# Allegro board Pictograma.brd
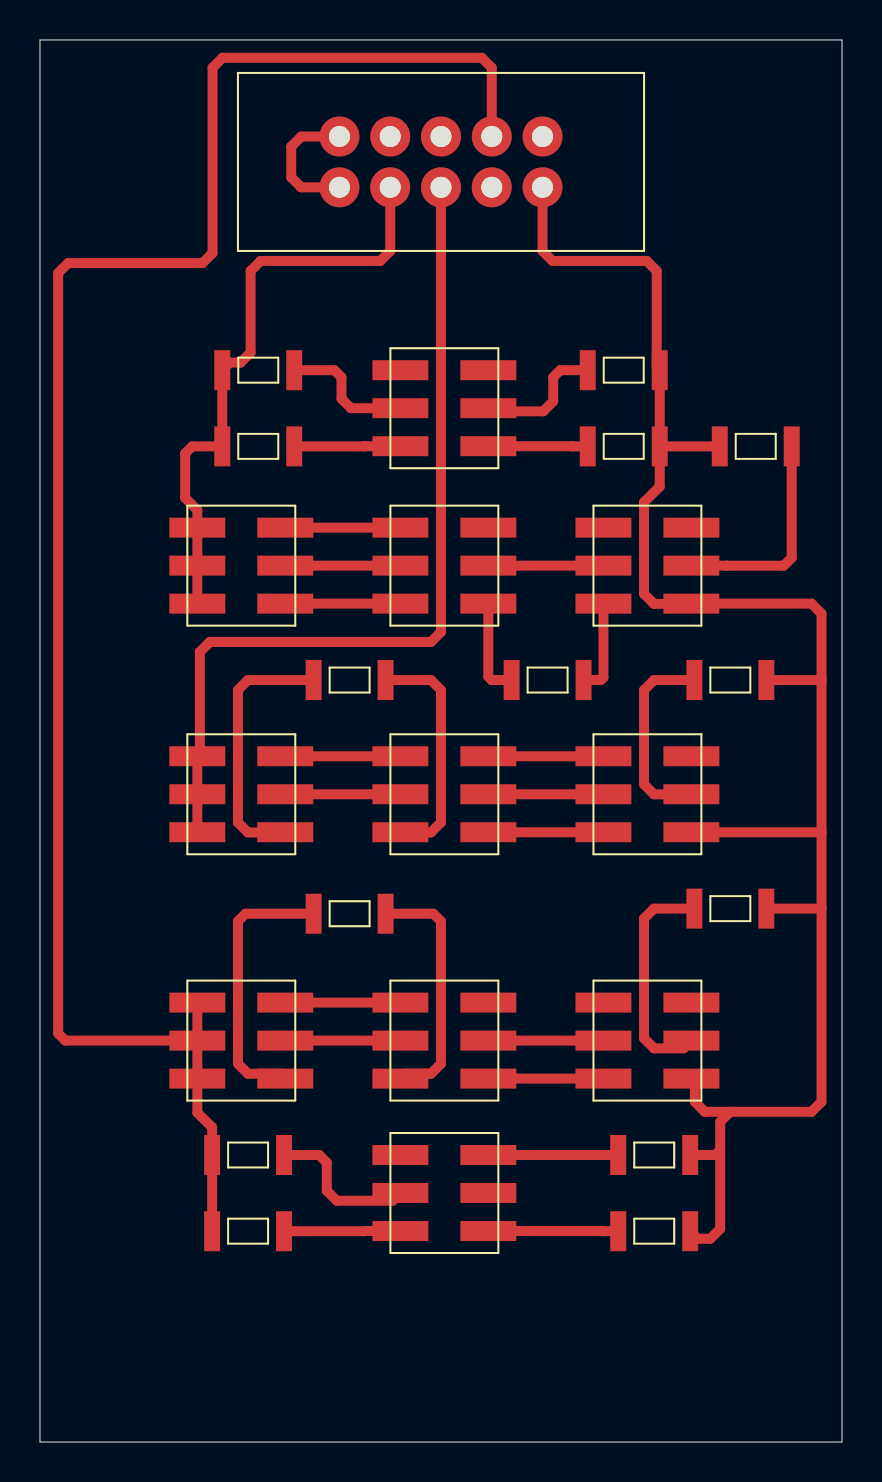
[diagram p0: board, top side]
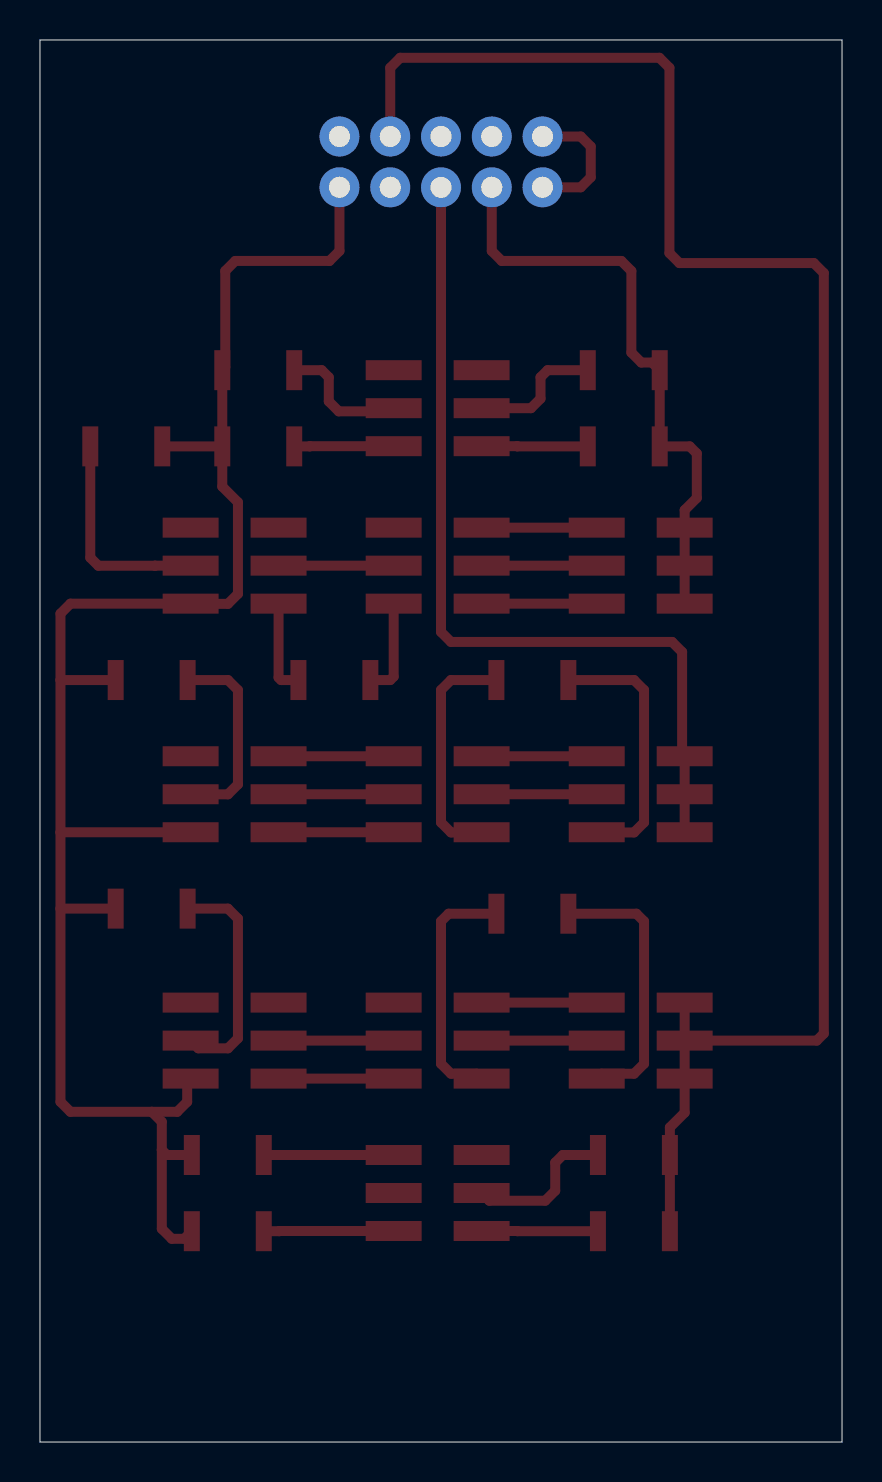
[diagram p1: board, bottom side, seen from below]

Outline 40.13 x 70.1 mm; copper layers: TOP, BOTTOM. Coordinates in mm from the lower left corner of the outline.
Outline path: 0,70.1 40.13,70.1 40.13,0 0,0 0,70.1

## Design rules (mm)
constraint set DEFAULT: min track width 0.127

## Placement (name value [footprint] x y rotation side)
CN1  Conector  [CONECTOR]  25.15 65.28 270 top
L1  Led  [LED32]  18.03 53.59 0 top
L2  Led  [LED32]  7.87 45.72 0 top
L3  Led  [LED32]  18.03 45.72 0 top
L4  Led  [LED32]  28.19 45.72 0 top
L5  Led  [LED32]  7.87 34.29 0 top
L6  Led  [LED32]  18.03 34.29 0 top
L7  Led  [LED32]  28.19 34.29 0 top
L8  Led  [LED32]  7.87 21.97 0 top
L9  Led  [LED32]  18.03 21.97 0 top
L10  Led  [LED32]  28.19 21.97 0 top
L11  Led  [LED32]  18.03 14.35 0 top
R1  Resistor  [RESISTOR2]  10.92 53.59 0 top
R2  Resistor  [RESISTOR2]  29.21 53.59 0 top
R3  Resistor  [RESISTOR2]  10.92 49.78 0 top
R4  Resistor  [RESISTOR2]  29.21 49.78 0 top
R5  Resistor  [RESISTOR2]  35.81 49.78 0 top
R6  Resistor  [RESISTOR2]  15.49 38.1 0 top
R7  Resistor  [RESISTOR2]  25.4 38.1 0 top
R8  Resistor  [RESISTOR2]  34.54 38.1 0 top
R9  Resistor  [RESISTOR2]  15.49 26.42 0 top
R10  Resistor  [RESISTOR2]  34.54 26.67 0 top
R11  Resistor  [RESISTOR2]  10.41 14.35 0 top
R12  Resistor  [RESISTOR2]  30.73 14.35 0 top
R13  Resistor  [RESISTOR2]  10.41 10.54 0 top
R14  Resistor  [RESISTOR2]  30.73 10.54 0 top

## Library data of the parts
CN1 = Conector
L1-L11 = Led
R1-R14 = Resistor

## Footprints (pads in the part's own frame, mm; a bottom-side part is the same pattern mirrored in y, then rotated)
CONECTOR
  round 2 hole 1.05: 1(0,0) 2(0,-2.54) 3(0,-5.08) 4(0,-7.62) 5(0,-10.16) 6(2.54,-10.16) 7(2.54,-7.62) 8(2.54,-5.08) 9(2.54,-2.54) 10(2.54,0)
LED32
  rect 2.8x1 smd: 1(0,0) 2(0,-1.9) 3(0,-3.8) 4(4.4,-3.8) 5(4.4,-1.9) 6(4.4,0)
RESISTOR2
  rect 0.8x2 smd: 1(-1.8,0) 2(1.8,0)

## Nets
N09998: CN1.8 L5.1 L5.2 L5.3(C3)
N10032: CN1.2 L8.1 L8.2 L8.3(C3) R11.1 R13.1
N11043: CN1.10 L4.4 L7.4 L10.4 R2.2 R4.2 R5.1 R8.2 R10.2 R12.2 R14.2
N11102: L4.5 R5.2
N11109: L1.4 R4.1
N11113: L1.5 R2.1
N11120: L1.3(C3) R3.2
N11124: CN1.7 L2.1 L2.2 L2.3(C3) R1.1 R3.1
N11150: L2.6 L3.1
N11154: L2.5 L3.2
N11167: L2.4 L3.3(C3)
N11171: L3.5 L4.2
N11175: L4.3(C3) R7.2
N11182: L3.4 R7.1
N11468: L8.4 R9.1
N11475: L8.6 L9.1
N11479: L8.5 L9.2
N11483: L9.3(C3) R9.2
N11490: L10.5 R10.1
N11497: L9.4 L10.3(C3)
N11501: L9.5 L10.2
N11505: L7.5 R8.1
N11512: L6.6 L7.1
N11516: L6.5 L7.2
N11520: L6.4 L7.3(C3)
N11524: L5.6 L6.1
N11528: L5.5 L6.2
N11532: L6.3(C3) R6.2
N11539: L5.4 R6.1
N18877: CN1.5 CN1.6
N18942: L11.4 R14.1
N18946: L11.6 R12.1
N18950: L11.2 R11.2
N18957: L11.3(C3) R13.2
N51235: L1.2 R1.2

Pads without a net: CN1 1 3 4 9; L1 1 6; L3 6; L4 1 6; L7 6; L9 6; L10 1 6; L11 1 5

## Routing (per net, layer and track width the routed paths; a pad name or vN(x,y) marks a point on that pad's centre or on a via; arc(x,y) is an arc through that point)
N09998: length 43.8
  TOP w0.5: L5.3 L5.2 L5.1 8,34.42 8,39.51 8.5,40.01 19.57,40.01 20.07,40.51 CN1.8
N10032: length 92.1
  TOP w0.5: CN1.2 22.61,68.72 22.11,69.22 9.14,69.22 8.64,68.72 8.64,59.45 8.14,58.95 1.41,58.95 0.91,58.45 0.91,20.43 1.26,20.07 L8.2 ; L8.2 L8.3 7.87,16.47 8.61,15.73 R11.1 R13.1 ; L8.2 L8.1
N11043: length 92.1
  TOP w0.5: CN1.10 25.15,59.55 25.65,59.05 30.36,59.05 30.86,58.55 30.86,53.74 R2.2 R4.2 ; 34.54,16.51 34.04,16.01 34.04,14.61 ; 34.54,16.51 38.61,16.51 39.11,17.01 39.11,26.67 ; 34.54,16.51 33.27,16.51 32.77,17.01 32.77,18 L10.4 ; R14.2 32.91,10.16 33.54,10.16 34.04,10.66 34.04,14.61 ; R4.2 31.01,47.77 30.23,46.99 30.23,42.41 30.73,41.91 32.58,41.91 L4.4 38.61,41.92 39.11,41.42 39.11,38.1 ; R4.2 R5.1 ; 34.04,14.61 33.78,14.35 R12.2 ; 39.11,30.48 39.11,38.1 ; 39.11,30.48 39.11,26.67 ; 39.11,30.48 39.1,30.49 L7.4 ; 39.11,38.1 R8.2 ; 39.11,26.67 R10.2
N11102: length 10.8
  TOP w0.5: R5.2 37.61,44.22 37.21,43.81 34.38,43.81 34.37,43.82 L4.5
N11109: length 5
  TOP w0.5: R4.1 26.63,49.78 26.62,49.79 L1.4
N11113: length 6.6
  TOP w0.5: R2.1 26.04,53.59 25.68,53.24 25.68,52.03 25.18,51.53 22.59,51.53 L1.5
N11120: length 5.3
  TOP w0.5: R3.2 16.25,49.78 16.26,49.79 L1.3
N11124: length 30
  TOP w0.5: CN1.7 17.53,59.55 17.03,59.05 11.04,59.05 10.54,58.55 10.54,54.48 10.04,53.98 9.5,53.98 R1.1 R3.1 7.62,49.78 7.27,49.43 7.27,47.21 7.87,46.6 L2.1 L2.2 L2.3
N11150: length 5.8
  TOP w0.5: L2.6 L3.1
N11154: length 5.8
  TOP w0.5: L2.5 L3.2
N11167: length 5.8
  TOP w0.5: L2.4 L3.3
N11171: length 5.8
  TOP w0.5: L3.5 L4.2
N11175: length 4.7
  TOP w0.5: L4.3 28.19,38.23 28.07,38.1 R7.2
N11182: length 4.9
  TOP w0.5: L3.4 22.43,38.27 22.61,38.1 R7.1
N11468: length 13.7
  TOP w0.5: L8.4 12.03,18.41 10.41,18.41 9.91,18.91 9.91,26.04 10.29,26.42 R9.1
N11475: length 5.8
  TOP w0.5: L8.6 L9.1
N11479: length 5.8
  TOP w0.5: L8.5 L9.2
N11483: length 12.4
  TOP w0.5: L9.3 18.28,18.41 19.57,18.41 20.07,18.91 20.07,26.04 19.68,26.42 R9.2
N11490: length 11.4
  TOP w0.5: L10.5 32.21,19.68 30.73,19.68 30.23,20.18 30.23,26.17 30.73,26.67 R10.1
N11497: length 5.8
  TOP w0.5: L9.4 L10.3
N11501: length 5.8
  TOP w0.5: L9.5 L10.2
N11505: length 10
  TOP w0.5: R8.1 30.73,38.1 30.23,37.6 30.23,32.88 30.73,32.38 32.59,32.38 L7.5
N11512: length 5.8
  TOP w0.5: L6.6 L7.1
N11516: length 5.8
  TOP w0.5: L6.5 L7.2
N11520: length 5.8
  TOP w0.5: L6.4 L7.3
N11524: length 5.8
  TOP w0.5: L5.6 L6.1
N11528: length 5.8
  TOP w0.5: L5.5 L6.2
N11532: length 11.8
  TOP w0.5: R6.2 19.57,38.1 20.07,37.6 20.07,30.98 19.57,30.48 18.04,30.48 L6.3
N11539: length 13.2
  TOP w0.5: R6.1 10.41,38.1 9.91,37.6 9.91,30.98 10.41,30.48 12.26,30.48 L5.4
N18877: length 6.8
  TOP w0.5: CN1.5 13.07,65.28 12.57,64.78 12.57,63.24 13.07,62.74 CN1.6
N18942: length 6.5
  TOP w0.5: R14.1 28.16,10.54 28.15,10.55 L11.4
N18946: length 6.5
  TOP w0.5: L11.6 R12.1
N18950: length 7.7
  TOP w0.5: L11.2 17.65,12.06 14.85,12.06 14.35,12.56 14.35,13.97 13.97,14.35 R11.2
N18957: length 5.8
  TOP w0.5: L11.3 16.26,10.55 16.25,10.54 R13.2
N51235: length 6.7
  TOP w0.5: R1.2 14.73,53.59 15.09,53.24 15.09,52.17 15.56,51.69 L1.2
